# Altium PCB feederWheel_2020-07-09_03-34-55.pcbdoc
Units mm, origin at the board's own origin, x right, y up, seen from the top; angles counter-clockwise.
Board outline 116.33 x 113.03 mm, 2 copper layers (Top Layer, Bottom Layer); 1 components, 1 nets, 0 pads, 0 vias.
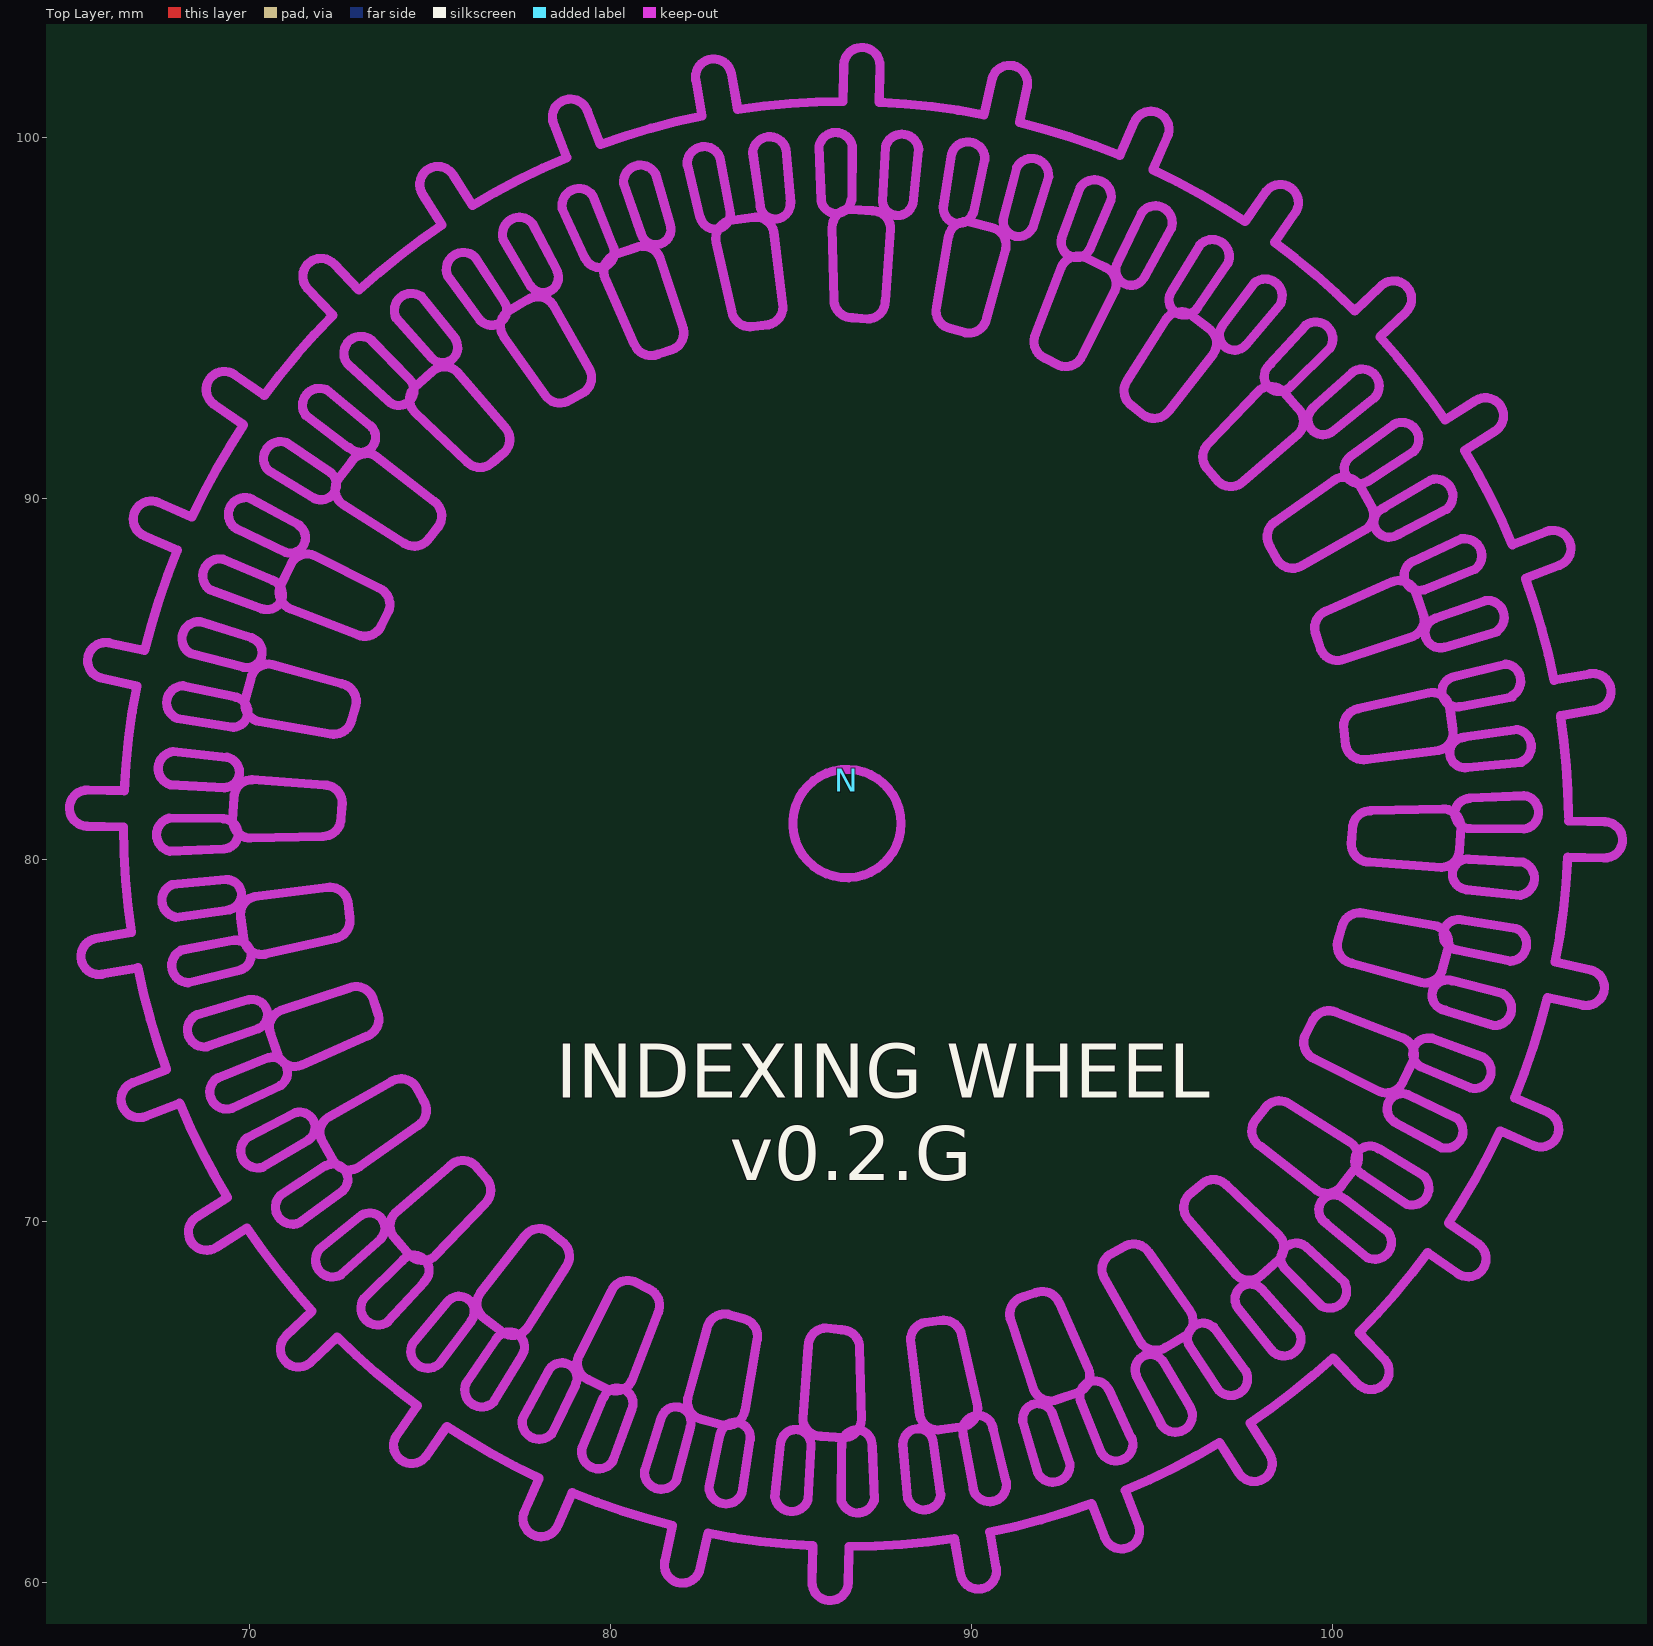
[diagram p0: Top Layer view]
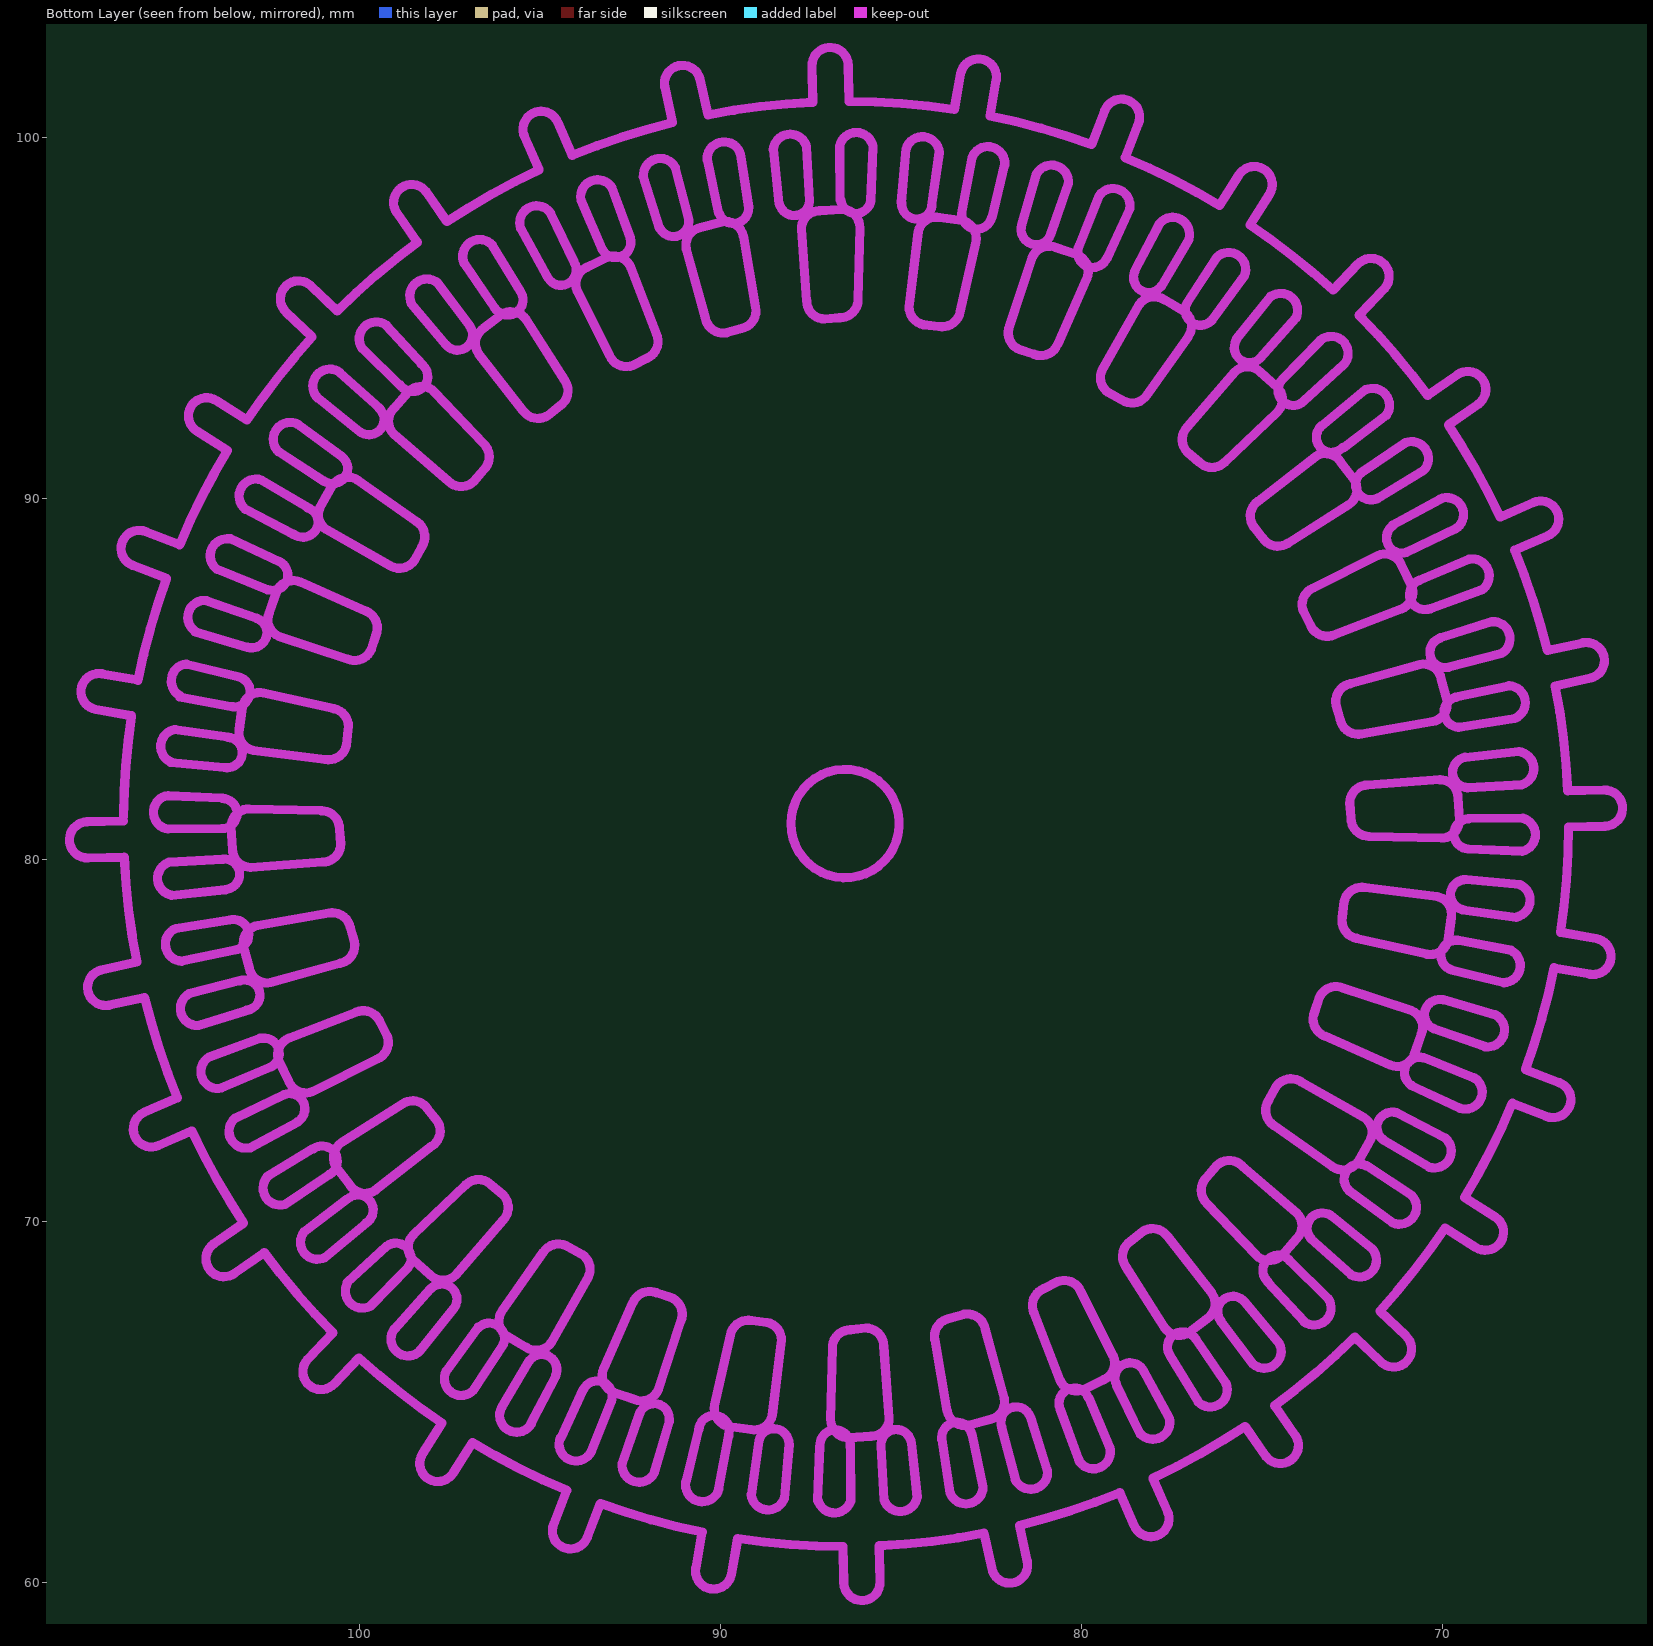
[diagram p1: Bottom Layer view, seen from below]

## Layer stack, top to bottom
Top Layer: signal copper (thickness not stored)
Dielectric: dielectric 0.32, FR-4, Dk 4.8
Bottom Layer: signal copper (thickness not stored)

## Board outline
141.732,25.4 25.4,25.4 25.4,138.43 141.732,138.43

## Components (designator, comment, footprint, x,y, rotation, side; value= is the part's Value field where it differs from the comment)
N "_" ? 86.55,82.201 r358.75 top

## Footprints (in the part's own frame and the unit in brackets; to place one, negate y for a bottom-side part, rotate by r counter-clockwise, add the part's x,y. Pads: shape width x height; smd on the part's side, far side on the other; paste and mask are expansions set on the pad)
? [mm]
  Keep-Out Layer lines w0.254: -20.998,-1.73 -19.992,-1.729 ; -20.999,-0.73 -19.993,-0.729 ; -20.69,-4.836 -19.703,-4.639 ; -20.696,2.377 -19.709,2.182 ; -20.494,-5.816 -19.507,-5.619 ; -20.502,3.358 -19.515,3.163 ; -19.585,-8.803 -18.656,-8.417 ; -19.598,6.346 -18.668,5.962 ; -19.202,-9.726 -18.272,-9.341 ; -19.217,7.27 -18.287,6.886 ; -17.728,-12.478 -16.892,-11.918 ; -17.748,10.024 -16.91,9.466 ; -17.172,-13.309 -16.335,-12.749 ; -17.193,10.856 -16.355,10.298 ; -15.189,-15.72 -14.478,-15.008 ; -15.215,13.271 -14.502,12.56 ; -14.481,-16.427 -13.771,-15.715 ; -14.508,13.979 -13.796,13.268 ; -12.067,-18.405 -11.508,-17.568 ; -12.097,15.961 -11.537,15.125 ; -11.235,-18.96 -10.677,-18.123 ; -11.266,16.517 -10.706,15.681 ; -8.481,-20.429 -8.096,-19.499 ; -8.514,17.991 -8.128,17.062 ; -7.556,-20.811 -7.172,-19.881 ; -7.591,18.375 -7.205,17.446 ; -4.569,-21.714 -4.373,-20.727 ; -4.604,19.284 -4.407,18.297 ; -3.587,-21.908 -3.392,-20.921 ; -3.624,19.479 -3.426,18.493 ; -0.481,-22.212 -0.482,-21.205 ; -0.517,18.782 -0.517,19.788 ; 0.519,-22.211 0.518,-21.204 ; 0.483,18.783 0.483,19.789 ; 3.428,-20.915 3.625,-21.902 ; 3.394,18.499 3.589,19.486 ; 4.409,-20.719 4.606,-21.706 ; 4.375,18.305 4.57,19.292 ; 7.207,-19.868 7.592,-20.797 ; 7.174,17.458 7.558,18.388 ; 8.13,-19.485 8.516,-20.414 ; 8.098,17.076 8.482,18.006 ; 10.708,-18.104 11.268,-18.94 ; 10.678,15.7 11.237,16.537 ; 11.539,-17.548 12.099,-18.384 ; 11.51,15.145 12.069,15.982 ; 13.798,-15.69 14.51,-16.401 ; 13.772,13.292 14.483,14.004 ; 14.504,-14.983 15.216,-15.694 ; 14.48,12.585 15.191,13.297 ; 16.357,-12.721 17.194,-13.279 ; 16.337,10.327 17.173,10.886 ; 16.912,-11.889 17.749,-12.447 ; 16.894,9.496 17.73,10.055 ; 18.289,-9.309 19.218,-9.693 ; 18.274,6.918 19.204,7.304 ; 18.67,-8.384 19.6,-8.769 ; 18.658,5.994 19.587,6.38 ; 19.517,-5.585 20.504,-5.781 ; 19.509,3.197 20.496,3.394 ; 19.711,-4.604 20.698,-4.8 ; 19.705,2.216 20.692,2.413 ; 19.995,-1.694 21.001,-1.693 ; 19.994,-0.694 21.001,-0.693
  Keep-Out Layer lines w0.254: -20.998,-1.73 cw(c-20.999,-1.23) -20.999,-0.73 ; -20.69,-4.836 ccw(c-20.592,-5.326) -20.494,-5.816 ; -20.696,2.377 cw(c-20.586,2.865) -20.502,3.358 ; -19.992,-1.729 ccw(c0.001,-1.21) -19.703,-4.639 ; -19.993,-0.729 cw(c0.001,-1.212) -19.709,2.182 ; -19.585,-8.803 ccw(c-19.393,-9.265) -19.202,-9.726 ; -19.507,-5.619 ccw(c0.001,-1.211) -18.656,-8.417 ; -19.598,6.346 cw(c-19.407,6.808) -19.217,7.27 ; -19.515,3.163 cw(c0.001,-1.211) -18.668,5.962 ; -18.272,-9.341 ccw(c0.001,-1.211) -16.892,-11.918 ; -18.287,6.886 cw(c0.001,-1.211) -16.91,9.466 ; -17.728,-12.478 ccw(c-17.45,-12.894) -17.172,-13.309 ; -17.748,10.024 cw(c-17.467,10.438) -17.193,10.856 ; -16.335,-12.749 ccw(c0.001,-1.212) -14.478,-15.008 ; -16.355,10.298 cw(c0.001,-1.211) -14.502,12.56 ; -15.189,-15.72 ccw(c-14.835,-16.073) -14.481,-16.427 ; -15.215,13.271 cw(c-14.861,13.625) -14.508,13.979 ; -13.771,-15.715 ccw(c0.001,-1.211) -11.508,-17.568 ; -13.796,13.268 cw(c0.001,-1.211) -11.537,15.125 ; -12.067,-18.405 ccw(c-11.643,-18.671) -11.235,-18.96 ; -12.097,15.961 cw(c-11.681,16.239) -11.266,16.517 ; -10.677,-18.123 ccw(c0,-1.211) -8.096,-19.499 ; -10.706,15.681 cw(c0,-1.212) -8.128,17.062 ; -8.481,-20.429 ccw(c-8.018,-20.62) -7.556,-20.811 ; -8.514,17.991 cw(c-8.052,18.183) -7.591,18.375 ; -7.172,-19.881 ccw(c0.001,-1.211) -4.373,-20.727 ; -7.205,17.446 cw(c0.001,-1.211) -4.407,18.297 ; -4.569,-21.714 ccw(c-4.079,-21.819) -3.587,-21.908 ; -4.604,19.284 cw(c-4.114,19.381) -3.624,19.479 ; -3.392,-20.921 ccw(c0,-1.211) -0.482,-21.205 ; -3.426,18.493 cw(c0,-1.211) -0.517,18.782 ; -0.481,-22.212 ccw(c0.019,-22.211) 0.519,-22.211 ; -0.517,19.788 cw(c-0.017,19.789) 0.483,19.789 ; 0.518,-21.204 ccw(c0.002,-1.211) 3.428,-20.915 ; 0.483,18.783 cw(c0.002,-1.211) 3.394,18.499 ; 3.625,-21.902 ccw(c4.116,-21.804) 4.606,-21.706 ; 4.409,-20.719 ccw(c0.001,-1.211) 7.207,-19.868 ; 3.589,19.486 cw(c4.079,19.382) 4.57,19.292 ; 4.375,18.305 cw(c0.001,-1.211) 7.174,17.458 ; 7.592,-20.797 ccw(c8.054,-20.606) 8.516,-20.414 ; 8.13,-19.485 ccw(c0.001,-1.211) 10.708,-18.104 ; 7.558,18.388 cw(c8.02,18.197) 8.482,18.006 ; 8.098,17.076 cw(c0.002,-1.212) 10.678,15.7 ; 11.268,-18.94 ccw(c11.683,-18.662) 12.099,-18.384 ; 11.539,-17.548 ccw(c0.001,-1.211) 13.798,-15.69 ; 11.237,16.537 cw(c11.645,16.248) 12.069,15.982 ; 11.51,15.145 cw(c0.001,-1.211) 13.772,13.292 ; 14.51,-16.401 ccw(c14.863,-16.048) 15.216,-15.694 ; 14.504,-14.983 ccw(c0.001,-1.212) 16.357,-12.721 ; 14.48,12.585 cw(c0.001,-1.211) 16.337,10.327 ; 14.483,14.004 cw(c14.837,13.651) 15.191,13.297 ; 16.912,-11.889 ccw(c0.001,-1.211) 18.289,-9.309 ; 17.194,-13.279 ccw(c17.476,-12.866) 17.749,-12.447 ; 16.894,9.496 cw(c0.001,-1.211) 18.274,6.918 ; 17.173,10.886 cw(c17.452,10.471) 17.73,10.055 ; 18.67,-8.384 ccw(c0.001,-1.211) 19.517,-5.585 ; 18.658,5.994 cw(c0.001,-1.211) 19.509,3.197 ; 19.218,-9.693 ccw(c19.409,-9.231) 19.6,-8.769 ; 19.204,7.304 cw(c19.395,6.842) 19.587,6.38 ; 19.711,-4.604 ccw(c0.001,-1.21) 19.995,-1.694 ; 19.706,2.209 cw(c0.001,-1.212) 19.991,-0.567 ; 20.504,-5.781 ccw(c20.588,-5.288) 20.698,-4.8 ; 20.496,3.394 cw(c20.594,2.904) 20.692,2.413 ; 21.001,-1.693 ccw(c21.001,-1.193) 21.001,-0.693

## Nets (pads, with @x,y where several pads share a name; then routed paths per layer and width w, separated by ;. In a path a pad name is that pad's centre, name@x,y a point inside that pad or via, vN(x,y) a via of type N, cw(c..) or ccw(c..) an arc to the next point about the centre after c; other vN are vias at no path point)
GND: 

## Polygon pours and split planes (outlines as drawn)
GND on Top Layer (solid): 126.873,118.745 129.032,38.1 38.1,40.259 40.767,125.73

## Keep-outs
Keep-Out Layer:
  lines w0.254: 67.791,81.15 ccw(c67.911,80.696) 67.808,80.237 ; 67.819,82.078 cw(c67.958,82.528) 67.895,82.993 ; 67.869,79.31 ccw(c68.059,78.88) 67.973,78.418 ; 68.016,83.911 cw(c68.19,84.347) 68.173,84.817 ; 68.122,77.492 ccw(c68.329,77.07) 68.314,76.6 ; 68.389,85.71 cw(c68.616,86.122) 68.641,86.591 ; 68.551,75.708 ccw(c68.766,75.291) 68.835,74.826 ; 68.935,87.463 cw(c69.19,87.858) 69.276,88.32 ; 69.154,73.977 ccw(c69.385,73.568) 69.526,73.12 ; 69.29,81.137 cw(c69.277,80.717) 69.304,80.298 ; 69.318,82.001 ccw(c69.316,82.421) 69.387,82.835 ; 69.359,79.453 cw(c69.37,79.033) 69.454,78.622 ; 69.498,83.673 ccw(c69.552,84.09) 69.637,84.501 ; 69.545,81.099 ccw(c70.045,81.099) 70.045,80.599 ; 69.585,81.717 cw(c70.085,81.718) 70.085,82.218 ; 69.595,77.77 cw(c69.638,77.352) 69.771,76.954 ; 69.653,89.156 cw(c69.9,89.556) 70.08,89.99 ; 69.773,78.395 cw(c70.263,78.493) 70.166,78.983 ; 69.841,85.33 ccw(c69.945,85.737) 70.071,86.137 ; 69.854,77.78 ccw(c70.344,77.878) 70.442,77.387 ; 69.891,84.413 ccw(c70.381,84.316) 70.284,83.825 ; 69.933,72.296 ccw(c70.24,71.94) 70.38,71.491 ; 69.994,76.122 cw(c70.092,75.713) 70.251,75.324 ; 70.051,85.014 cw(c70.541,84.916) 70.639,85.406 ; 70.348,86.954 ccw(c70.504,87.344) 70.651,87.738 ; 70.536,90.778 cw(c70.872,91.106) 71.042,91.545 ; 70.552,74.522 cw(c70.648,74.113) 70.88,73.763 ; 70.602,75.174 cw(c71.064,75.365) 70.873,75.827 ; 70.803,74.586 ccw(c71.265,74.778) 71.456,74.316 ; 70.866,70.711 ccw(c71.201,70.383) 71.39,69.952 ; 70.875,87.597 ccw(c71.337,87.406) 71.146,86.944 ; 71.008,88.511 ccw(c71.143,88.909) 71.366,89.265 ; 71.149,88.154 cw(c71.611,87.963) 71.802,88.425 ; 71.28,72.996 cw(c71.406,72.596) 71.665,72.265 ; 71.573,92.3 cw(c71.95,92.58) 72.14,93.01 ; 71.816,90.007 ccw(c71.999,90.385) 72.271,90.705 ; 71.951,69.223 ccw(c72.312,68.922) 72.549,68.516 ; 72.046,72.175 cw(c72.462,72.453) 72.184,72.869 ; 72.046,80.648 ccw(c72.046,81.148) 72.546,81.148 ; 72.081,82.071 cw(c72.081,81.571) 72.581,81.57 ; 72.129,71.531 cw(c72.316,71.155) 72.604,70.85 ; 72.151,79.228 cw(c72.248,78.738) 72.739,78.835 ; 72.255,83.483 ccw(c72.352,83.974) 72.843,83.876 ; 72.357,71.638 ccw(c72.773,71.916) 73.051,71.5 ; 72.394,77.825 ccw(c72.296,78.316) 72.787,78.413 ; 72.463,90.528 ccw(c72.879,90.25) 72.601,89.834 ; 72.568,84.872 cw(c72.47,84.382) 72.96,84.284 ; 72.743,93.706 cw(c73.095,94.018) 73.396,94.379 ; 72.773,76.454 cw(c72.964,75.992) 73.426,76.183 ; 72.781,91.406 ccw(c73.085,91.696) 73.296,92.059 ; 72.839,91.021 cw(c73.255,90.743) 73.533,91.159 ; 73.014,86.224 ccw(c73.205,86.686) 73.667,86.494 ; 73.116,70.159 cw(c73.341,69.805) 73.657,69.528 ; 73.175,67.85 ccw(c73.566,67.591) 73.843,67.21 ; 73.286,75.126 ccw(c73.094,75.588) 73.556,75.779 ; 73.591,87.526 cw(c73.399,87.064) 73.861,86.873 ; 73.855,92.695 ccw(c74.148,92.996) 74.439,93.299 ; 73.926,73.855 cw(c74.204,73.44) 74.62,73.717 ; 74.048,69.516 cw(c74.401,69.87) 74.048,70.223 ; 74.067,95.006 cw(c74.492,95.207) 74.761,95.592 ; 74.223,68.881 cw(c74.564,68.635) 74.845,68.323 ; 74.292,88.763 ccw(c74.57,89.179) 74.986,88.901 ; 74.458,69.05 ccw(c74.811,69.404) 75.165,69.05 ; 74.527,66.604 ccw(c74.948,66.394) 75.248,66.033 ; 74.592,92.384 cw(c74.945,92.738) 74.592,93.091 ; 74.687,72.652 ccw(c74.409,73.068) 74.825,73.346 ; 75.057,93.502 cw(c75.41,93.149) 75.764,93.502 ; 75.065,93.877 ccw(c75.357,94.179) 75.698,94.424 ; 75.112,89.927 cw(c74.834,89.512) 75.25,89.234 ; 75.487,67.757 cw(c75.817,67.497) 76.153,67.245 ; 75.498,96.161 cw(c75.931,96.344) 76.254,96.685 ; 75.563,71.53 cw(c75.916,71.177) 76.27,71.53 ; 76.003,65.493 ccw(c76.442,65.324) 76.775,64.992 ; 76.041,91.005 ccw(c76.394,91.359) 76.748,91.005 ; 76.382,94.958 ccw(c76.714,95.215) 77.076,95.429 ; 76.391,67.992 ccw(c76.807,67.715) 76.529,67.299 ; 76.545,70.499 ccw(c76.191,70.853) 76.545,71.206 ; 76.847,66.732 cw(c77.206,66.513) 77.55,66.273 ; 77.022,66.922 ccw(c77.299,67.338) 77.715,67.06 ; 77.032,97.187 cw(c77.485,97.314) 77.833,97.629 ; 77.041,94.499 cw(c77.457,94.777) 77.179,95.192 ; 77.072,91.279 ccw(c76.718,91.633) 77.072,91.986 ; 77.58,64.561 ccw(c78.032,64.43) 78.384,64.118 ; 77.623,69.569 cw(c78.038,69.292) 78.316,69.707 ; 77.717,95.503 cw(c77.994,95.087) 78.41,95.365 ; 77.799,95.878 ccw(c78.143,96.119) 78.529,96.285 ; 78.195,92.863 ccw(c78.61,93.141) 78.888,92.725 ; 78.282,65.843 cw(c78.658,65.656) 79.034,65.469 ; 78.648,69.443 cw(c78.37,69.028) 78.786,68.75 ; 78.672,98.025 cw(c79.134,98.111) 79.511,98.391 ; 79.124,66.261 ccw(c79.586,66.07) 79.395,65.608 ; 79.224,63.735 ccw(c79.677,63.612) 80.092,63.391 ; 79.259,92.93 ccw(c78.981,93.346) 79.397,93.624 ; 79.302,96.664 ccw(c79.694,96.814) 80.072,96.998 ; 79.818,65.114 cw(c80.208,64.957) 80.599,64.806 ; 79.857,96.092 cw(c80.319,96.284) 80.128,96.746 ; 79.952,65.334 ccw(c80.143,65.796) 80.605,65.604 ; 80.024,68.048 cw(c80.486,67.857) 80.678,68.319 ; 80.369,98.714 cw(c80.837,98.76) 81.245,98.994 ; 80.668,94.263 ccw(c81.13,94.455) 81.322,93.993 ; 80.715,96.947 cw(c80.906,96.485) 81.368,96.676 ; 80.865,97.298 ccw(c81.258,97.446) 81.663,97.555 ; 80.947,63.101 ccw(c81.414,63.045) 81.84,62.847 ; 81.055,68.125 cw(c80.864,67.663) 81.326,67.471 ; 81.407,64.531 cw(c81.816,64.436) 82.213,64.299 ; 81.725,94.123 ccw(c81.534,94.585) 81.996,94.776 ; 82.13,99.233 cw(c82.598,99.271) 83.04,99.43 ; 82.143,65.097 ccw(c82.633,65) 82.536,64.509 ; 82.493,97.777 ccw(c82.901,97.879) 83.314,97.954 ; 82.678,67.025 cw(c83.168,66.928) 83.266,67.418 ; 82.734,62.639 ccw(c83.204,62.641) 83.643,62.474 ; 82.929,97.108 cw(c83.419,97.205) 83.322,97.695 ; 83.042,64.099 cw(c83.452,64.011) 83.868,63.95 ; 83.136,64.349 ccw(c83.233,64.84) 83.724,64.742 ; 83.368,95.156 ccw(c83.858,95.254) 83.956,94.763 ; 83.673,67.3 cw(c83.575,66.81) 84.066,66.712 ; 83.937,97.777 cw(c84.034,97.287) 84.525,97.385 ; 83.942,99.579 cw(c84.41,99.544) 84.859,99.684 ; 84.149,98.092 ccw(c84.564,98.157) 84.983,98.188 ; 84.378,94.811 ccw(c84.28,95.302) 84.771,95.399 ; 84.559,62.355 ccw(c85.023,62.429) 85.469,62.28 ; 84.716,63.845 cw(c85.134,63.809) 85.551,63.761 ; 85.331,64.544 ccw(c85.831,64.544) 85.831,64.044 ; 85.479,66.539 cw(c85.979,66.539) 85.979,67.039 ; 85.777,99.744 cw(c86.24,99.661) 86.7,99.759 ; 85.837,98.244 ccw(c86.251,98.311) 86.668,98.261 ; 86.14,97.503 cw(c86.64,97.504) 86.64,98.004 ; 86.19,95.504 ccw(c86.69,95.504) 86.69,95.004 ; 86.397,62.251 ccw(c86.845,62.392) 87.298,62.267 ; 86.402,66.99 cw(c86.402,66.49) 86.902,66.49 ; 86.41,63.749 cw(c86.826,63.801) 87.245,63.763 ; 86.45,64.004 ccw(c86.45,64.504) 86.95,64.504 ; 87.113,94.969 ccw(c87.113,95.469) 87.613,95.469 ; 87.259,97.964 cw(c87.259,97.464) 87.759,97.463 ; 87.539,98.224 ccw(c87.958,98.253) 88.364,98.144 ; 87.614,99.73 cw(c88.07,99.615) 88.538,99.654 ; 88.05,81.002 cw(c86.55,81.004) 88.05,81.006 ; 88.105,63.771 cw(c88.521,63.833) 88.934,63.906 ; 88.236,62.326 ccw(c88.682,62.475) 89.149,62.428 ; 88.321,66.608 cw(c88.811,66.706) 88.713,67.196 ; 88.566,64.623 ccw(c89.056,64.721) 89.154,64.23 ; 89.026,95.295 ccw(c89.516,95.198) 89.418,94.707 ; 89.136,67.244 cw(c89.233,66.754) 89.724,66.851 ; 89.22,98.051 ccw(c89.64,98.033) 90.039,97.903 ; 89.367,97.266 cw(c89.857,97.168) 89.955,97.658 ; 89.447,99.533 cw(c89.898,99.403) 90.367,99.368 ; 89.769,64.312 ccw(c89.671,64.803) 90.162,64.9 ; 89.78,64.064 cw(c90.177,64.202) 90.596,64.232 ; 89.826,94.591 ccw(c89.924,95.081) 90.415,94.983 ; 90.045,62.576 ccw(c90.498,62.702) 90.962,62.775 ; 90.555,97.498 cw(c90.457,97.008) 90.948,96.91 ; 90.882,97.724 ccw(c91.298,97.67) 91.674,97.482 ; 91.095,67.231 cw(c91.557,67.423) 91.366,67.885 ; 91.257,99.176 cw(c91.665,98.942) 92.134,98.907 ; 91.423,64.454 cw(c91.836,64.528) 92.217,64.706 ; 91.722,65.331 ccw(c92.184,65.523) 92.376,65.061 ; 91.766,94.536 ccw(c92.228,94.345) 92.037,93.883 ; 91.77,68.014 cw(c91.961,67.553) 92.423,67.744 ; 91.842,63.012 ccw(c92.252,63.241) 92.719,63.294 ; 92.414,93.689 ccw(c92.605,94.151) 93.067,93.959 ; 92.485,96.403 cw(c92.947,96.212) 93.139,96.674 ; 92.495,97.201 ccw(c92.9,97.09) 93.265,96.882 ; 92.964,65.262 ccw(c92.772,65.724) 93.234,65.915 ; 92.998,98.598 cw(c93.399,98.353) 93.862,98.273 ; 93.021,65.01 cw(c93.415,65.155) 93.79,65.344 ; 93.578,63.616 ccw(c93.996,63.83) 94.439,63.989 ; 93.695,68.384 cw(c94.11,68.662) 93.833,69.077 ; 93.695,96.4 cw(c93.504,95.938) 93.966,95.746 ; 94.053,96.54 ccw(c94.412,96.321) 94.796,96.152 ; 94.205,69.282 cw(c94.482,68.866) 94.898,69.144 ; 94.305,93.258 ccw(c94.72,92.98) 94.443,92.564 ; 94.563,65.723 cw(c94.949,65.888) 95.292,66.13 ; 94.681,66.643 ccw(c95.096,66.921) 95.374,66.505 ; 94.689,97.883 cw(c95.086,97.632) 95.527,97.47 ; 94.775,92.3 ccw(c95.053,92.716) 95.469,92.438 ; 95.238,64.383 ccw(c95.642,64.624) 96.059,64.84 ; 95.376,94.948 cw(c95.791,94.67) 96.069,95.086 ; 95.537,95.731 ccw(c95.886,95.499) 96.242,95.276 ; 95.911,66.816 ccw(c95.633,67.232) 96.049,67.509 ; 96.019,66.575 cw(c96.399,66.755) 96.698,67.049 ; 96.02,70.021 cw(c96.373,70.375) 96.02,70.728 ; 96.316,97.013 cw(c96.664,96.698) 97.096,96.511 ; 96.344,71.002 cw(c96.697,70.649) 97.051,71.002 ; 96.548,90.801 cw(c96.901,91.155) 96.548,91.508 ; 96.561,94.708 cw(c96.283,94.293) 96.699,94.015 ; 96.822,90.477 ccw(c97.175,90.831) 97.529,90.477 ; 96.831,65.319 ccw(c97.173,65.642) 97.595,65.849 ; 96.949,94.784 ccw(c97.279,94.525) 97.608,94.264 ; 97.326,68.506 ccw(c97.679,68.86) 98.033,68.506 ; 97.384,67.577 cw(c97.714,67.837) 98.024,68.12 ; 97.841,95.976 cw(c98.129,95.605) 98.555,95.407 ; 97.842,72.774 ccw(c98.257,72.496) 97.98,72.08 ; 97.926,92.957 cw(c98.279,92.604) 98.633,92.957 ; 98.107,73.106 cw(c98.522,72.829) 98.8,73.244 ; 98.266,88.662 cw(c98.682,88.94) 98.404,89.356 ; 98.285,93.728 ccw(c98.521,93.38) 98.876,93.155 ; 98.318,66.402 ccw(c98.648,66.737) 99.025,67.018 ; 98.473,88.29 ccw(c98.888,88.568) 99.166,88.152 ; 98.499,68.916 ccw(c98.145,69.27) 98.499,69.623 ; 98.655,68.709 cw(c98.984,68.97) 99.233,69.308 ; 99.043,91.784 ccw(c98.689,92.138) 99.043,92.491 ; 99.231,75.136 ccw(c99.693,74.945) 99.502,74.483 ; 99.252,94.798 cw(c99.528,94.418) 99.918,94.155 ; 99.425,75.513 cw(c99.887,75.322) 100.079,75.784 ; 99.446,92.495 ccw(c99.73,92.186) 99.988,91.855 ; 99.535,86.229 cw(c99.997,86.42) 99.806,86.882 ; 99.556,70.85 ccw(c99.834,71.266) 100.25,70.988 ; 99.665,85.824 ccw(c100.127,86.016) 100.319,85.554 ; 99.7,67.639 ccw(c99.912,68.059) 100.323,68.287 ; 99.802,69.952 cw(c100.032,70.304) 100.319,70.61 ; 100.039,90.508 cw(c100.317,90.092) 100.733,90.37 ; 100.132,77.723 ccw(c100.622,77.626) 100.525,77.135 ; 100.249,78.131 cw(c100.739,78.034) 100.837,78.524 ; 100.306,83.594 cw(c100.796,83.692) 100.699,84.182 ; 100.354,83.172 ccw(c100.844,83.27) 100.942,82.779 ; 100.476,91.16 ccw(c100.738,90.832) 100.993,90.498 ; 100.489,72.174 cw(c100.211,71.758) 100.627,71.48 ; 100.511,80.437 ccw(c101.011,80.437) 101.011,79.937 ; 100.531,93.488 cw(c100.813,93.112) 101.134,92.769 ; 100.546,80.86 cw(c101.046,80.86) 101.046,81.36 ; 100.812,71.298 cw(c101.026,71.659) 101.266,72.003 ; 100.906,89.139 ccw(c100.628,89.555) 101.044,89.833 ; 100.947,68.991 ccw(c101.155,69.412) 101.519,69.709 ; 101.288,73.583 ccw(c101.479,74.045) 101.941,73.853 ; 101.428,89.745 ccw(c101.559,89.346) 101.815,89.013 ; 101.634,87.692 cw(c101.825,87.23) 102.287,87.421 ; 101.698,92.057 cw(c101.909,91.637) 102.228,91.292 ; 101.699,72.752 cw(c101.924,73.107) 102.081,73.496 ; 101.944,75.064 cw(c101.753,74.602) 102.215,74.41 ; 102.055,70.462 ccw(c102.19,70.913) 102.543,71.222 ; 102.198,88.249 ccw(c102.395,87.878) 102.538,87.483 ; 102.218,86.182 ccw(c102.026,86.644) 102.488,86.835 ; 102.434,74.273 cw(c102.633,74.644) 102.741,75.049 ; 102.452,76.601 ccw(c102.549,77.092) 103.04,76.994 ; 102.649,84.62 cw(c102.746,84.13) 103.237,84.228 ; 102.71,90.516 cw(c102.853,90.068) 103.151,89.705 ; 102.807,78.182 cw(c102.709,77.692) 103.2,77.594 ; 102.831,86.682 ccw(c102.973,86.287) 103.095,85.885 ; 102.926,83.024 ccw(c102.828,83.515) 103.319,83.612 ; 103.005,79.79 ccw(c103.005,80.29) 103.505,80.29 ; 103.013,72.032 ccw(c103.132,72.486) 103.434,72.847 ; 103.045,81.409 cw(c103.045,80.909) 103.545,80.908 ; 103.121,75.836 cw(c103.167,76.254) 103.296,76.653 ; 103.318,85.056 ccw(c103.438,84.653) 103.495,84.237 ; 103.441,77.507 cw(c103.475,77.926) 103.592,78.329 ; 103.565,88.88 cw(c103.652,88.418) 103.93,88.039 ; 103.634,83.388 ccw(c103.656,82.969) 103.73,82.555 ; 103.703,79.18 cw(c103.73,79.599) 103.772,80.017 ; 103.729,80.865 cw(c103.801,81.279) 103.787,81.699 ; 103.812,73.679 ccw(c103.913,74.138) 104.152,74.542 ; 104.227,87.18 cw(c104.274,86.712) 104.498,86.299 ; 104.463,75.413 ccw(c104.479,75.883) 104.713,76.29 ; 104.792,85.419 cw(c104.731,84.953) 104.965,84.546 ; 104.909,77.195 ccw(c104.893,77.665) 105.074,78.099 ; 105.083,83.605 cw(c105.024,83.139) 105.19,82.699 ; 105.192,79.023 ccw(c105.111,79.486) 105.269,79.929 ; 105.286,81.782 cw(c105.225,81.316) 105.292,80.851

## Silkscreen, mask and mechanical layers (free items; w line width, h text height)
Top Overlay:
  text "INDEXING WHEEL" at 78.486,73.418 h1.5
  text "v0.2.G" at 83.312,71.132 h1.5
Top Solder:
  lines w1.9: 104.575,81.001 cw(c86.55,81.004) 104.575,81.007
  lines w2.5: 102.068,81.021 cw(c86.568,81.023) 102.068,81.026
Document:
  lines w0.003: 83.54,81.889 83.591,81.94